# Altium PCB PCB_50_50.PcbDoc
Units mil, origin at the board's own origin, x right, y up, seen from the top; angles counter-clockwise.
Board outline 6000 x 4000 mil, 2 copper layers (Top Layer, Bottom Layer); 26 components, 18 nets, 66 pads, 0 vias.
Unrouted connection lines stored in the file: 23.
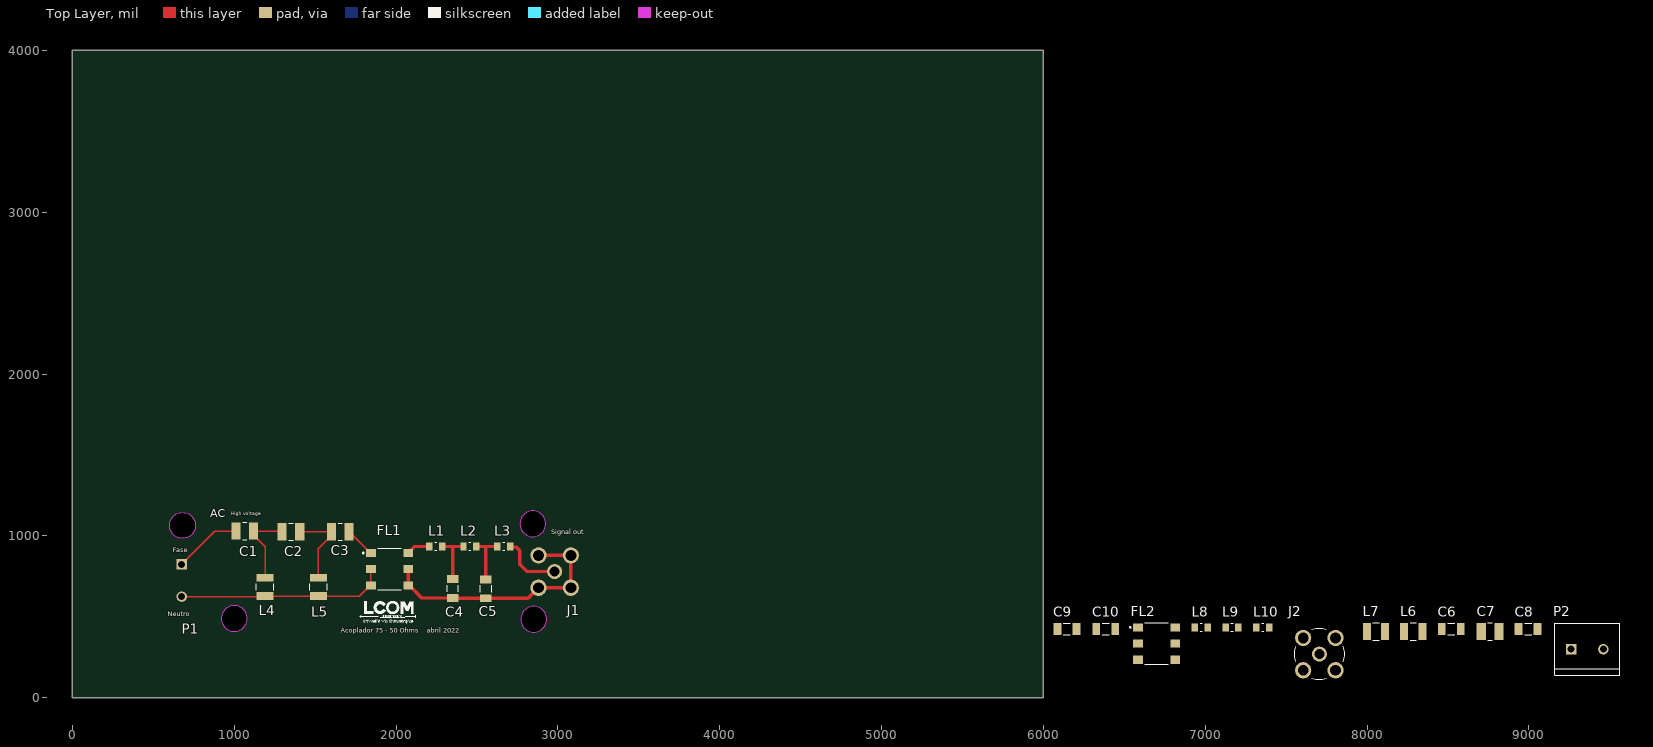
[diagram p0: Top Layer view]
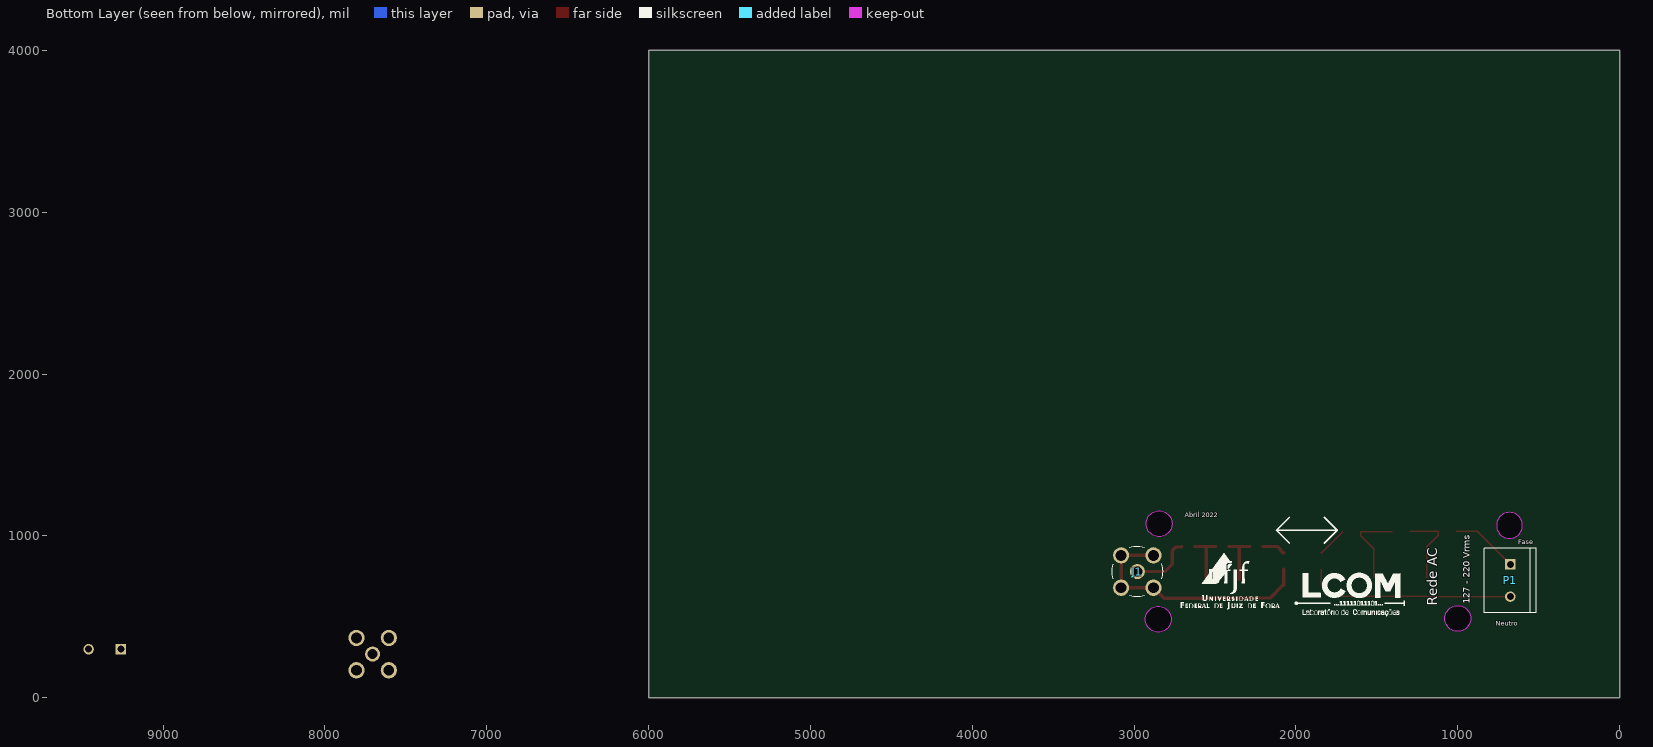
[diagram p1: Bottom Layer view, seen from below]

## Layer stack, top to bottom
Top Solder: solder mask 0.4, Solder Resist, Dk 3.5
Top Layer: signal copper 1.4
Dielectric 1: dielectric 12.6, FR-4, Dk 4.8
Bottom Layer: signal copper 1.4
Bottom Solder: solder mask 0.4, Solder Resist, Dk 3.5

## Board outline
0,0 6000,0 6000,4000 0,4000
cut-out: 2765,1075 ccw(c2845,1075) 2845,995 ccw(c2845,1075) 2925,1075 ccw(c2845,1075) 2845,1155 ccw(c2845,1075)
cut-out: 2770,485 ccw(c2850,485) 2850,405 ccw(c2850,485) 2930,485 ccw(c2850,485) 2850,565 ccw(c2850,485)
cut-out: 920,490 ccw(c1000,490) 1000,410 ccw(c1000,490) 1080,490 ccw(c1000,490) 1000,570 ccw(c1000,490)
cut-out: 680,985 cw(c680,1065) 600,1065 cw(c680,1065) 680,1145 cw(c680,1065) 760,1065 cw(c680,1065)

## Design rules (kind name [scope] priority, off if disabled: settings)
Clearance [All] p1: gap=10 ignorepadtopadclearanceinfootprint=FALSE except(0: Arc-Hole Track-Hole SMDPad-Hole THPad-Hole Via-Hole Fill-Hole Poly-Hole Region-Hole Text-Hole)
PolygonConnect [All] p1: connectstyle=Relief reliefconductorwidth=10 reliefentries=4 polygonreliefangle="90 Angle" airgapwidth=10
RoomDefinition acoplador_50_50 [InComponentClass('acoplador_50_50')] p1: confinementstyle=ConfineIn formatcopy=TRUE lockcomponents=FALSE outline 6045,60 9580,60 9580,580 6045,580
RoutingVias [All] p1: holewidth=28 width=50 viastyle="Through Hole" minholewidth=28 minwidth=50 maxholewidth=28 maxwidth=50
SolderMaskExpansion [All] p1: expansion=4 istentingtop=FALSE
Width [All] p1: maxlimit=10 minlimit=10 preferedwidth=10
30 further rules are at their usual default settings.

## Classes and differential pairs
component class acoplador_50_50: C6 C7 C8 C9 C10 FL2 J2 L6 L7 L8 L9 L10 P2

## Components (designator, comment, footprint, x,y, rotation, side; value= is the part's Value field where it differs from the comment)
C1 "cap_1210 1.3nF" CAPC3225X200N 1065,1030 r0 top
C2 "cap_1210 620 pF" CAPC3225X200N 1350,1025 r0 top
C3 "cap_1210 1.3nF" CAPC3225X200N 1655,1025 r0 top
C4 "cap1206 82pF" CAPC3216X160N 2350,675 r270 top
C5 "cap1206 82pF" CAPC3216X160N 2555,673.46 r270 top
C6 "cap1206" CAPC3216X160N 8520,425 r0 top
C7 "cap_1210" CAPC3225X200N 8760,410 r0 top
C8 "cap1206" CAPC3216X160N 8995,425 r0 top
C9 "cap1206 82pF" CAPC3216X160N 6145,425 r0 top
C10 "cap1206 82pF" CAPC3216X160N 6385,425 r0 top
FL1 "RF_Transformer" FIL_KA4909-AL 1960,795 r0 top
FL2 "RF_Transformer" FIL_KA4909-AL 6700,335 r0 top
J1 "SMA" JOHNSON_142-0701-201 2980,780 r180 bottom
J2 "SMA" JOHNSON_142-0701-201 7705,270 r0 top
L1 "ind_0805 180nH" IND_ASMCI-0805-4R7M-T 2245,935 r0 top
L2 "ind_0805 330nH" IND_ASMCI-0805-4R7M-T 2455.63,935 r0 top
L3 "ind_0805 180nH" IND_ASMCI-0805-4R7M-T 2665,935 r0 top
L4 "ind_1210 4.7 uH" INDC3225X120N 1190,685 r90 top
L5 "ind_1210 4.7 uH" INDC3225X120N 1520,685 r90 top
L6 "ind_1210" INDC3225X120N 8285,410 r0 top
L7 "ind_1210" INDC3225X120N 8055,410 r0 top
L8 "ind_0805 180nH" IND_ASMCI-0805-4R7M-T 6975,435 r0 top
L9 "ind_0805 330nH" IND_ASMCI-0805-4R7M-T 7165,435 r0 top
L10 "ind_0805 180nH" IND_ASMCI-0805-4R7M-T 7355,435 r0 top
P1 "KRE_2_way" TE_282837-2 675,725 r270 bottom
P2 "KRE_2_way" TE_282837-2 9360,300 r0 top

## Footprints (in the part's own frame and the unit in brackets; to place one, negate y for a bottom-side part, rotate by r counter-clockwise, add the part's x,y. Pads: shape width x height; smd on the part's side, far side on the other; paste and mask are expansions set on the pad)
CAPC3216X160N [mm]
  rect 1.24x1.82 smd: 1(-1.485,0) 2(1.485,0)
  silkscreen extent -0.54,-0.9 0.54,0.9, body extent -1.6,-0.8 1.6,0.8, height 1.6
CAPC3225X200N [mm]
  rect 1.45x2.72 smd: 1(-1.382,0) 2(1.382,0)
  silkscreen extent -0.34,-1.35 0.34,1.35, body extent -1.6,-1.25 1.6,1.25, height 2
FIL_KA4909-AL [mm]
  rect 1.52x1.27 smd: 1(-2.925,2.54) 2(-2.925,0) 3(-2.925,-2.54) 4(2.925,-2.54) 5(2.925,0) 6(2.925,2.54)
  silkscreen extent -4.23,-3.24 1.85,3.24, body extent -3.59,-3.25 3.59,3.25, height 4.65
IND_ASMCI-0805-4R7M-T [mm]
  rect 1x1.25 smd: 1(-1,0) 2(1,0)
  silkscreen extent -0.18,-0.63 0.18,0.63, body extent -1,-0.63 1,0.63, height 1.26
INDC3225X120N [mm]
  rect 1.24x2.72 smd: 1(-1.44,0) 2(1.44,0)
  silkscreen extent -0.5,-1.35 0.5,1.35, body extent -1.6,-1.25 1.6,1.25, height 1.2
JOHNSON_142-0701-201 [mil]
  round 93 hole 62: 1(0,0)
  round 100.5 hole 67: 2(-100,100) 3(100,100) 4(100,-100) 5(-100,-100)
  silkscreen extent -156,-156 156,156, body extent -156,-156 156,156, height 380
TE_282837-2 [mm]
  rect 1.65x1.65 hole 1.1: 1(-2.54,0)
  round 1.65 hole 1.1: 2(2.54,0)
  silkscreen extent -5.08,-4.1 5.08,4.1, body extent -4.95,-4.14 5.81,4.06, height 10.3

## Part data
C1 C2 C3: library part cap_1210, "CAPACITOR, X7T, 33NF; Capacitance:33000pF; Capacitance Tolerance:Â± 10%; Dielectric Characteristic:X7T; Voltage Rating:630V; Capacitor Case Style:1210 [3225 Metric]; Operating Temperature Min:-55Â°C; Operating Temperature Max:125Â°C; Packaging:Cut Tape; SVHC:No SVHC (19-Dec-2012); Capacitor Terminals:SMD; Operating Temperature Range:-55Â°C to +125Â°C", Package=None, Availability=Unavailable, MF="{'manufacturer': u'Murata Electronics'}", MP=GR332DD72J333KW01L, Price=None
C4 C5 C9 C10: library part cap1206, Package=None, Availability=Unavailable, MF="{'manufacturer': u'Syfer'}", MP=1206J2K00820JCT, Price=None
C6 C8: Package=None, Availability=Unavailable, MF="{'manufacturer': u'Syfer'}", MP=1206J2K00820JCT, Price=None
C7: "CAPACITOR, X7T, 33NF; Capacitance:33000pF; Capacitance Tolerance:Â± 10%; Dielectric Characteristic:X7T; Voltage Rating:630V; Capacitor Case Style:1210 [3225 Metric]; Operating Temperature Min:-55Â°C; Operating Temperature Max:125Â°C; Packaging:Cut Tape; SVHC:No SVHC (19-Dec-2012); Capacitor Terminals:SMD; Operating Temperature Range:-55Â°C to +125Â°C", Package=None, Availability=Unavailable, MF="{'manufacturer': u'Murata Electronics'}", MP=GR332DD72J333KW01L, Price=None
FL1 FL2: "Bias Injection Choke PWB 1.5 AL 30k 300M 1:1.5", Package=None, Availability=Unavailable, MF="{'manufacturer': u'Coilcraft'}", MP=KA4909-AL, Price=None
J1 J2: "Johnson Components 142-0701-201 / Conn Recept Straight Pcb .155\"\"", Package=None, Availability=Unavailable, MF="{'manufacturer': u'Cinch Connectivity Solutions Johnson'}", MP=142-0701-201, Price=None
L1 L2 L3 L8 L9 L10: library part ind_0805, Package=None, Availability=Unavailable, MF="{'manufacturer': u'Abracon'}", MP=ASMCI-0805-4R7M-T, Price=None
L4 L5: library part ind_1210, "Ind Metal Alloy Shielded 1.5uH 20% 1MHz Powdered Iron 2.6A 1210 T/R", Package=None, Availability=Unavailable, MF="{'manufacturer': u'Murata Electronics'}", MP=1277AS-H-1R5M=P2, Price=None
L6 L7: "Ind Metal Alloy Shielded 1.5uH 20% 1MHz Powdered Iron 2.6A 1210 T/R", Package=None, Availability=Unavailable, MF="{'manufacturer': u'Murata Electronics'}", MP=1277AS-H-1R5M=P2, Price=None
P1 P2: "TERM BLOCK 5.08MM 2POS SIDE ENTY", Package=None, Availability=Unavailable, MF="{'manufacturer': u'TE Connectivity'}", MP=282837-2, Price=None

## Nets (pads, with @x,y where several pads share a name; then routed paths per layer and width w, separated by ;. In a path a pad name is that pad's centre, name@x,y a point inside that pad or via, vN(x,y) a via of type N, cw(c..) or ccw(c..) an arc to the next point about the centre after c; other vN are vias at no path point)
GND: C9.2 C10.2 FL2.4 FL2.5 J2.2 J2.3 J2.4 J2.5
GND_quente: FL2.2 FL2.3 L6.1 L7.1 P2.2
NetC1_1: 
NetC1_2: 
NetC2_2: 
NetC3_2: 
NetC4_1: 
NetC5_1: 
NetC6_1: C6.1 P2.1
NetC6_2: C6.2 C7.1 L6.2
NetC7_2: C7.2 C8.1 L7.2
NetC8_2: C8.2 FL2.1
NetC9_1: C9.1 L8.2 L9.1
NetC10_1: C10.1 L9.2 L10.1
NetFL1_6: 
NetFL2_6: FL2.6 L8.1
NetJ1_1: 
NetJ2_1: J2.1 L10.2
pads on no net: C1.1 C1.2 C2.1 C2.2 C3.1 C3.2 C4.1 C4.2 C5.1 C5.2 FL1.1 FL1.2 FL1.3 FL1.4 FL1.5 FL1.6 J1.1 J1.2 J1.3 J1.4 J1.5 L1.1 L1.2 L2.1 L2.2 L3.1 L3.2 L4.1 L4.2 L5.1 L5.2 P1.1 P1.2
copper on no net: | length 5691.1
  Top Layer w8.76: 675,625 1186.69,625 1190,628.31 1520,628.31 1773.23,628.31 1839.92,695 1844.84,695 1844.84,795 ; 675,825 880,1030 1010.59,1030 ; 1190,741.69 1190,934.41 1119.41,1005 1119.41,1030 1290.59,1030 1295.59,1025 ; 1404.41,1025 1600.59,1025 1600.59,1000 1520,919.41 1520,741.69 ; 1709.41,1025 1839.41,895 1839.92,895
  Top Layer w10: 1839.92,895 1844.84,895
  Top Layer w21.05: 2075.16,795 2075.16,695 2080.08,695 2158.54,616.54 2350,616.54 2350.77,615.77 2554.23,615.77 2555,615 2815,615 2880,680 3080,680 3080,880 2880,880 ; 2075.16,895 2080.08,895 2094.55,909.48 2094.55,914.4 2115.16,935 2205.63,935 ; 2284.37,935 2350.32,935 ; 2350,733.46 2350,934.68 2350.32,935 ; 2416.26,935 2350.32,935 ; 2495,935 2550,935 ; 2555,731.93 2555,930 2550,935 ; 2625.63,935 2550,935 ; 2704.37,935 2707.67,931.7 2743.3,931.7 2765,910 2765,825 2810,780 2980,780

## Other copper
Multi-Layer:
  pour cut-out: 920,490 ccw(c1000,490) 1000,410 ccw(c1000,490) 1080,490 ccw(c1000,490) 1000,570 ccw(c1000,490)
  pour cut-out: 2770,485 ccw(c2850,485) 2850,405 ccw(c2850,485) 2930,485 ccw(c2850,485) 2850,565 ccw(c2850,485)

## Silkscreen, mask and mechanical layers (free items; w line width, h text height)
Top Overlay:
  drawing of 58 lines, arcs and shapes, not listed
  text "High voltage" at 978.37,1126.66 h20
  text "AC" at 850,1115 h50
  text "Signal out" at 2957.5,1010 h30
  text "Fase" at 620,900 h30
  text "Neutro" at 590,505 h30
  text "Acoplador 75 - 50 Ohms    abril 2022" at 1657,402 h30
Bottom Overlay:
  drawing of 105 lines, arcs and shapes, not listed
  text "Abril 2022" at 2688,1117 h30
  text "Fase" at 625,950 h30
  text "127 - 220 Vrms" at 925,580 h40 r270
  text "Rede AC" at 1125,570 h60 r270
  text "Neutro" at 765,445 h30
Mechanical 13:
  circle w10: c2845,1075 r80
  circle w10: c1000,490 r80
  circle w10: c2850,485 r80
  circle w10: c680,1065 r80
  lines w10: 485,450 ccw(c575,450) 575,360 3125,360 ccw(c3125,450) 3215,450 3215,1115 ccw(c3125,1115) 3125,1205 575,1205 ccw(c575,1115) 485,1115 485,450